# Altium PCB MT32Pi_Top.PcbDoc
Units mm, origin at the board's own origin, x right, y up, seen from the top; angles counter-clockwise.
Board outline 56 x 65 mm, 2 copper layers (F.Cu, B.Cu), stack 1.671 mm thick; 1 components, 9 nets, 6 pads, 0 vias.
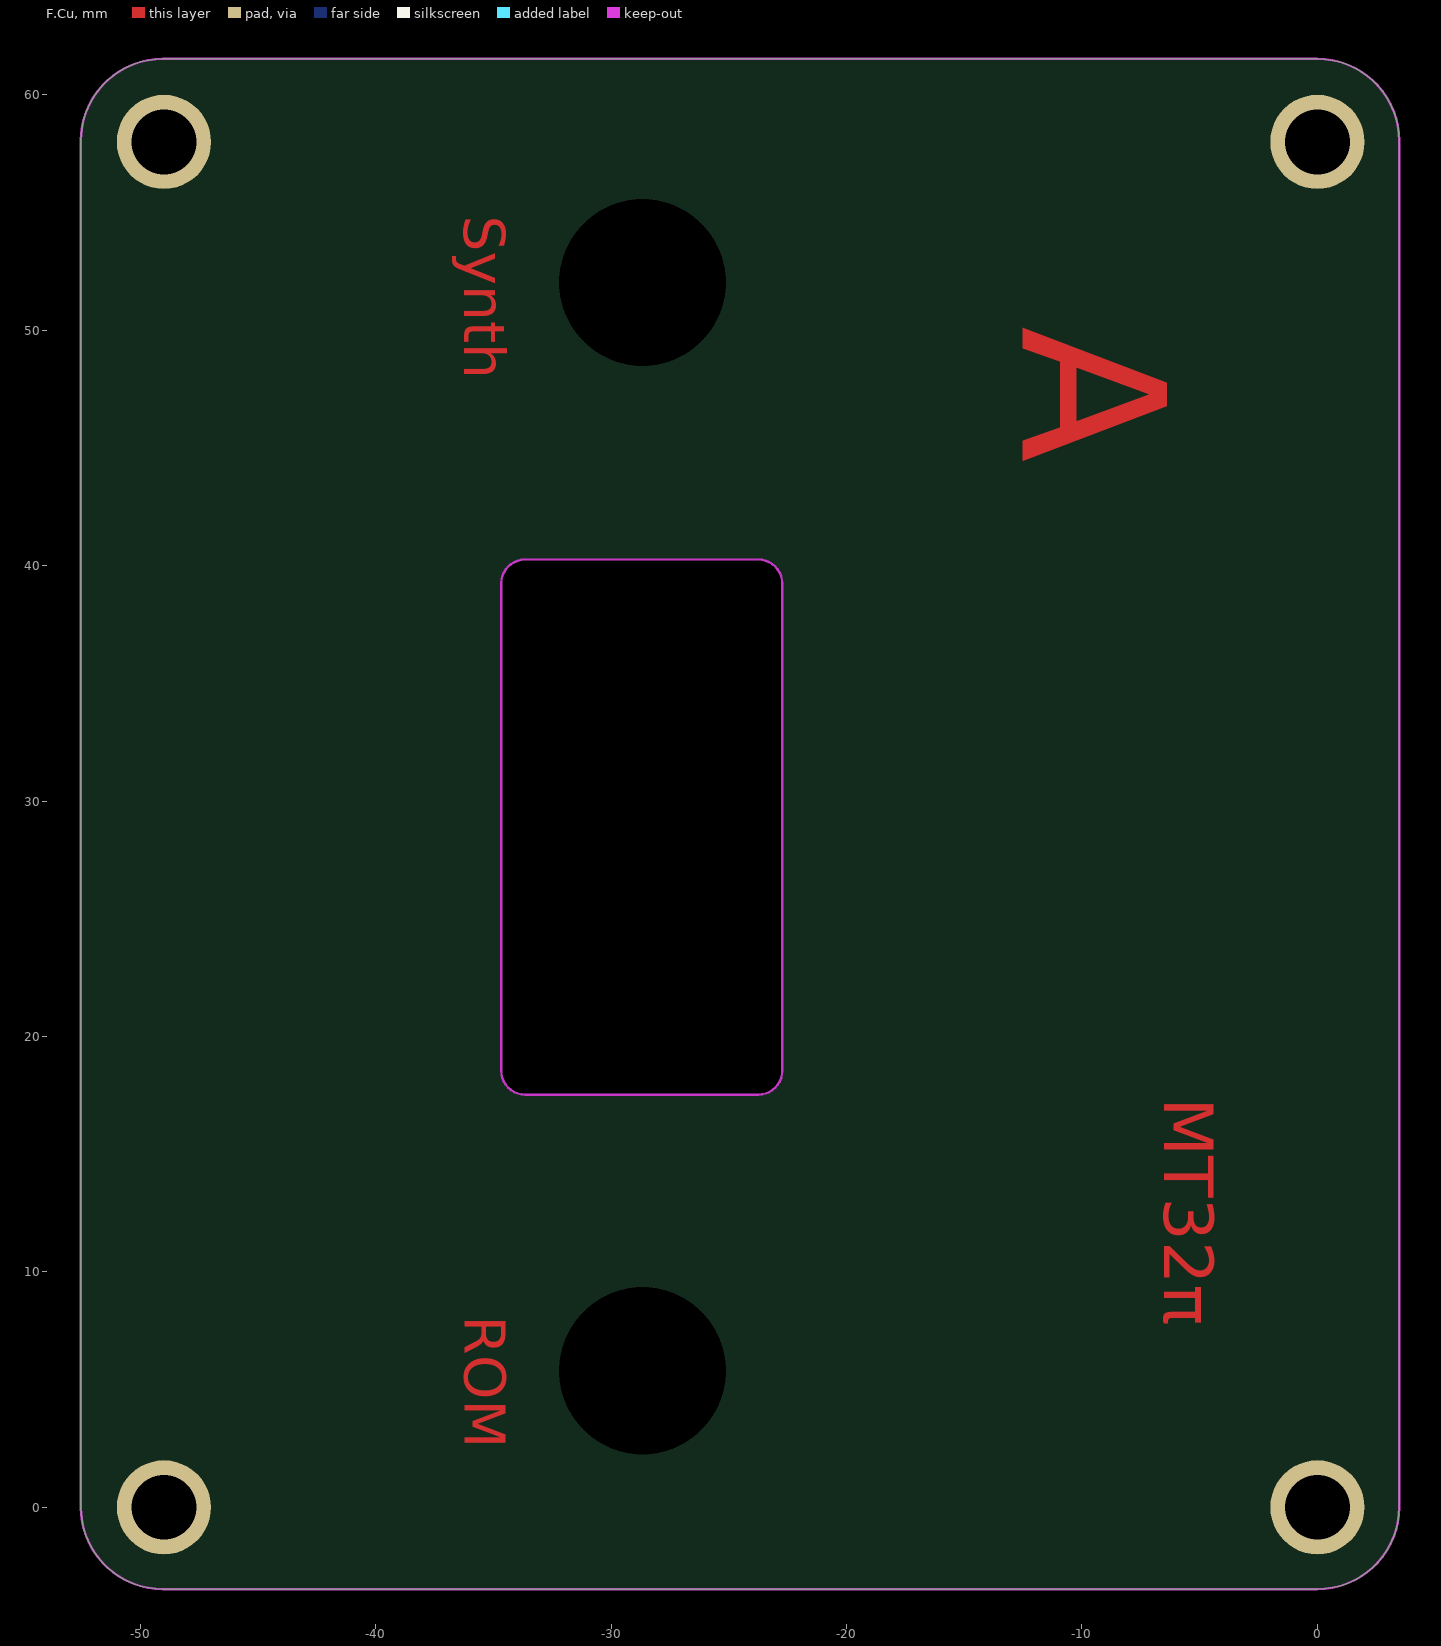
[diagram p0: F.Cu view]
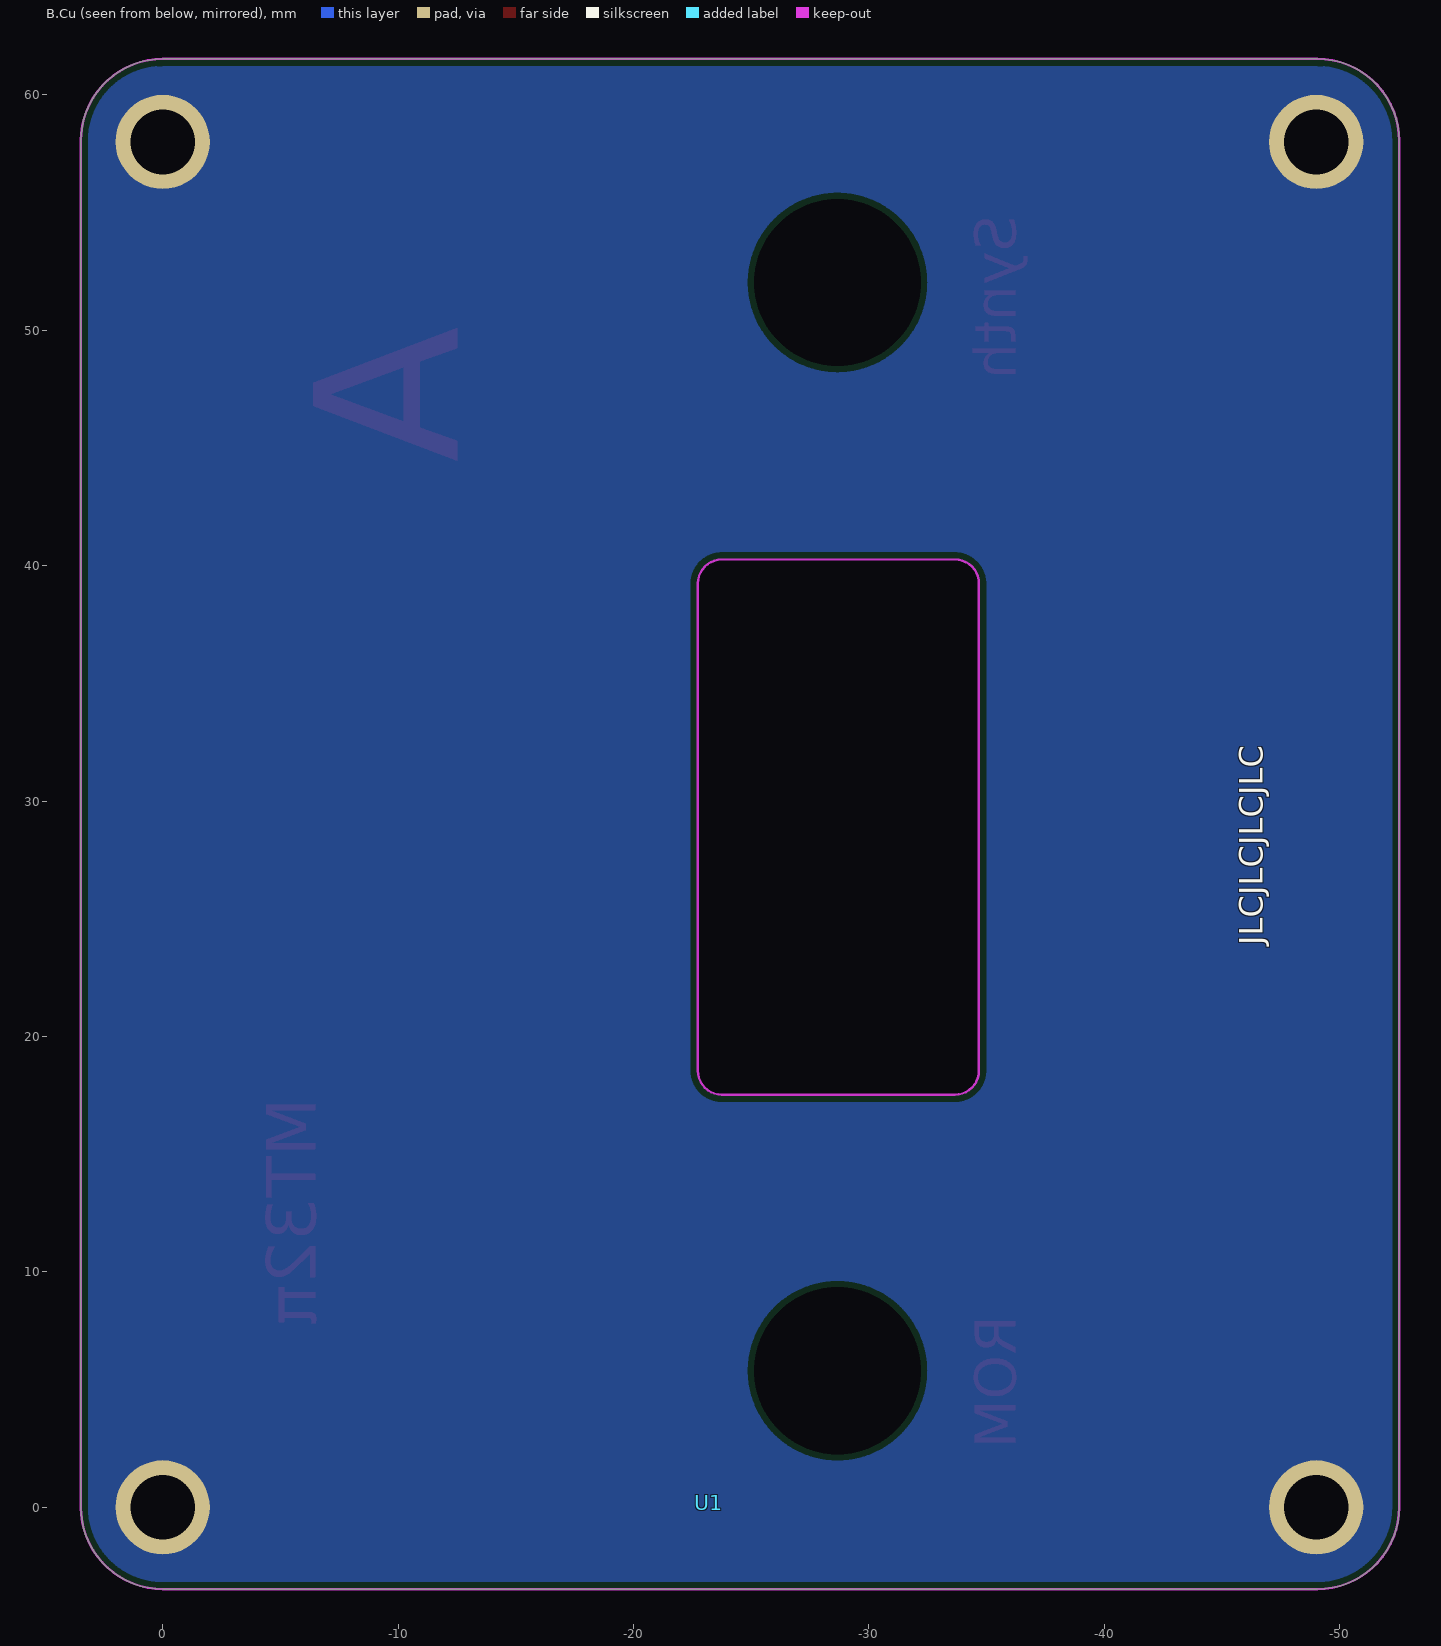
[diagram p1: B.Cu view, seen from below]

## Layer stack, top to bottom
F.Mask: solder mask 0.0102, Solder Resist, Dk 3.5
F.Cu: signal copper 0.0356
Dielectric 1: dielectric 1.6, FR-4, Dk 4.8
B.Cu: signal copper 0.0356
B.Mask: solder mask 0.0102, Solder Resist, Dk 3.5

## Board outline
-52.525,0 ccw(c-49.05,0) -49.05,-3.475 0,-3.475 ccw(c0,0) 3.475,0 3.475,58.05 ccw(c0,58.05) 0,61.525 ccw(c0,61.5) 0,61.525 -49.05,61.525 cw(c-49.05,61.5) -49.05,61.525 ccw(c-49.05,58.05) -52.525,58.05
cut-out: -34.671,18.542 ccw(c-33.655,18.542) -33.655,17.526 -23.749,17.526 ccw(c-23.749,18.542) -22.733,18.542 -22.733,39.243 ccw(c-23.749,39.243) -23.749,40.259 -33.655,40.259 ccw(c-33.655,39.243) -34.671,39.243

## Design rules (kind name [scope] priority, off if disabled: settings)
Clearance Clearence [All] p1: gap=0.254 ignorepadtopadclearanceinfootprint=FALSE
HoleSize "Hole Size (Default)" [All] p1: absolutevalues=TRUE maxlimit=10 minlimit=0.3 maxpercent=80.000 minpercent=20.000
MinimumSolderMaskSliver [All] p1: minsoldermaskwidth=0
PolygonConnect Polygon_B.Cu-GND_ConnectDirect [All] p1: connectstyle=Direct reliefconductorwidth=0.254 reliefentries=4 polygonreliefangle="90 Angle" airgapwidth=0.254
RoutingVias [All] p1: holewidth=0.711 width=1.27 viastyle="Through Hole" minholewidth=0.711 minwidth=1.27 maxholewidth=0.711 maxwidth=1.27
SilkToSilkClearance [All] p1: silktosilkclearance=0
SilkToSolderMaskClearance [IsPad] p1: minsilkscreentomaskgap=0 clearancetoexposedcopper=TRUE
SolderMaskExpansion [All] p1: expansion=0.102 istentingtop=FALSE
Width [All] p1: maxlimit=10 minlimit=0.2 preferedwidth=0.25 minimp=50.000000 maximp=50.000000 favimp=50.000000
26 further rules are at their usual default settings.

## Components (designator, comment, footprint, x,y, rotation, side; value= is the part's Value field where it differs from the comment)
U1 "JLCJLCJLCJLC" JLCJLCJLCJLC -23.2,0.2 r180 bottom

## Footprints (in the part's own frame and the unit in brackets; to place one, negate y for a bottom-side part, rotate by r counter-clockwise, add the part's x,y. Pads: shape width x height; smd on the part's side, far side on the other; paste and mask are expansions set on the pad)
JLCJLCJLCJLC [mm]

## Free pads (board coordinates)
  round 0 hole 7.1 unplated: 3(-28.662,5.801) 3(-28.662,52.029)
  round 4 hole 2.75: ""(-49,0) ""(-49,58) ""(0,0) ""(0,58)

## Nets (pads, with @x,y where several pads share a name; then routed paths per layer and width w, separated by ;. In a path a pad name is that pad's centre, name@x,y a point inside that pad or via, vN(x,y) a via of type N, cw(c..) or ccw(c..) an arc to the next point about the centre after c; other vN are vias at no path point)
GND: pad.
PCM_CLK: 
PCM_DOUT: 
PCM_FS: 
RXD: 
SCL: 
SDA: 
TX+: 
VCC: 

## Polygon pours and split planes (outlines as drawn)
GND on B.Cu "B.Cu-GND" (solid, remove dead copper, pour order 1): -52.614,61.525 3.475,61.525 3.475,-3.475 -52.52,-3.475

## Keep-outs
Edge.Cuts:
  lines w0.1: -49.05,61.525 ccw(c-49.05,58.05) -52.525,58.05 -52.525,0 ccw(c-49.05,0) -49.05,-3.475 0,-3.475 ccw(c0,0) 3.475,0 3.475,58.05 ccw(c0,58.05) 0,61.525 ; -49.05,61.525 ccw(c-49.05,61.5) -49.05,61.525 ; -49.05,61.525 -49.05,61.525 ; -49.05,61.525 -49.05,61.525 ; -49.05,61.525 0,61.525 ; 0,61.525 ccw(c0,61.5) 0,61.525 ; -34.671,18.542 ccw(c-33.655,18.542) -33.655,17.526 -23.749,17.526 ccw(c-23.749,18.542) -22.733,18.542 -22.733,39.243 ccw(c-23.749,39.243) -23.749,40.259 -33.655,40.259 ccw(c-33.655,39.243) -34.671,39.243 -34.671,18.542

## Other copper
F.Cu:
  text "Synth" at -36.809,54.863 h3 r270
  text "A" at -14.986,50.165 h13 r270
  text "MT32π" at -7.206,17.398 h3.6 r270
  text "ROM" at -36.803,8.127 h3 r270

## Silkscreen, mask and mechanical layers (free items; w line width, h text height)
F.Mask:
  text "Synth" at -36.809,54.863 h3 r270
  text "A" at -14.986,50.165 h13 r270
  text "MT32π" at -7.206,17.398 h3.6 r270
  text "ROM" at -36.803,8.127 h3 r270